# Altium PCB 12-digit-display.PcbDoc
Units mil, origin at the board's own origin, x right, y up, seen from the top; angles counter-clockwise.
Board outline 4900 x 1250 mil, 2 copper layers (Top Layer, Bottom Layer); 13 components, 20 nets, 142 pads, 0 vias.
Unrouted connection lines stored in the file: 1.
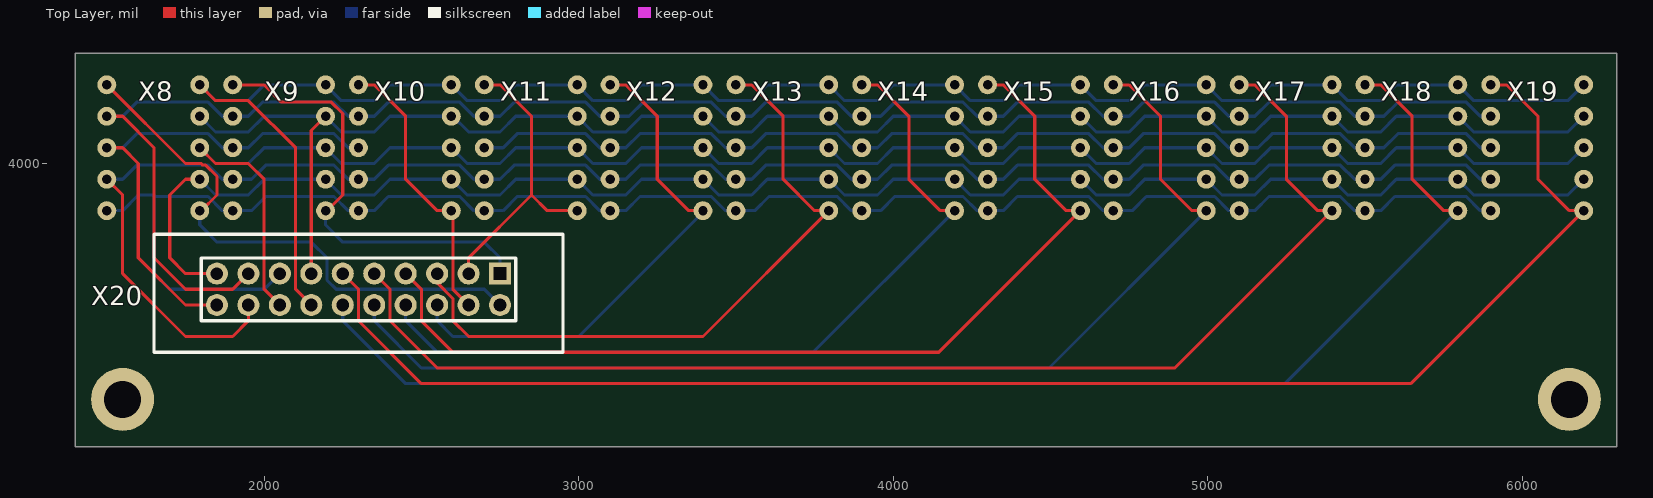
[diagram p0: Top Layer view]
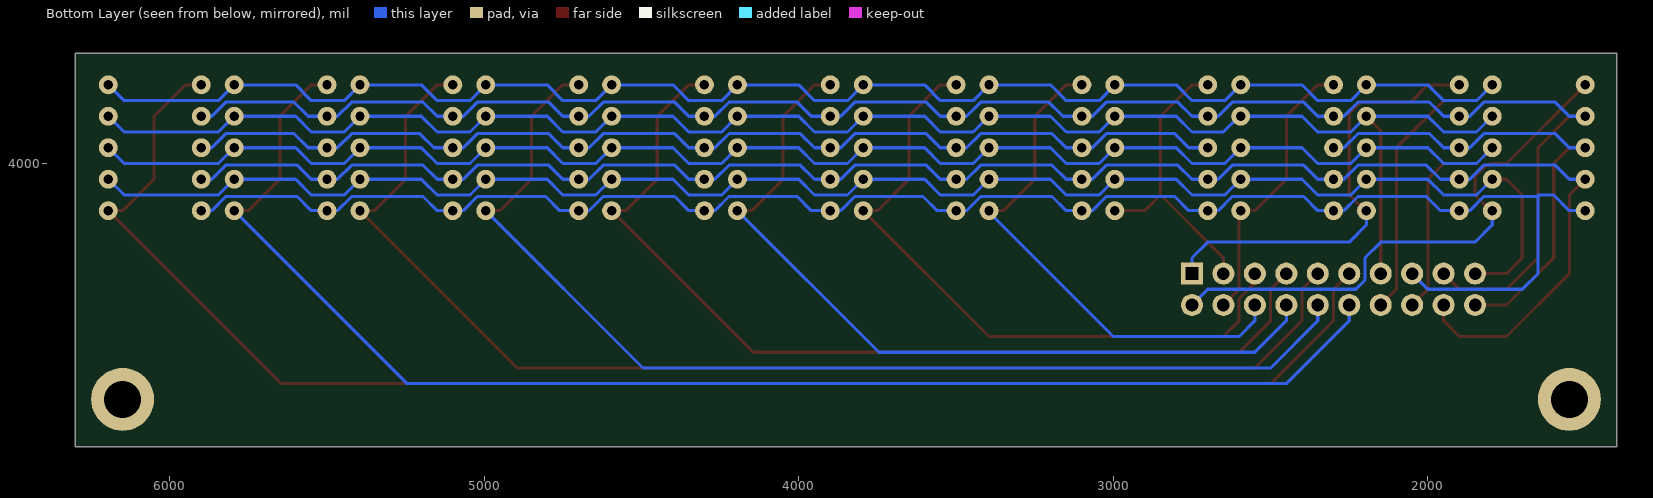
[diagram p1: Bottom Layer view, seen from below]
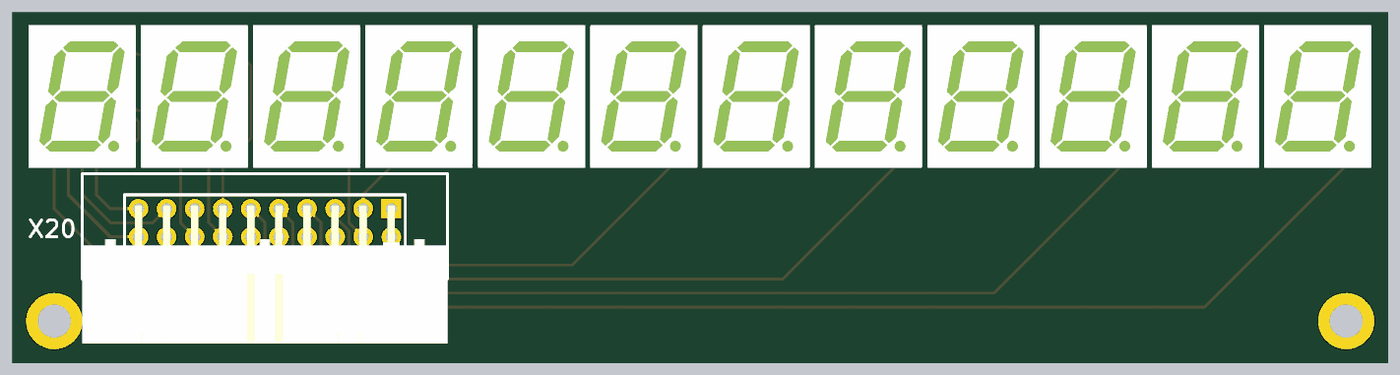
[diagram p2: 3D render of the assembled board from above, using the file's embedded part models]

## Layer stack, top to bottom
Top Solder: solder mask 0.4, Solder Resist, Dk 3.5
Top Layer: signal copper 1.4
Dielectric 1: dielectric 12.6, FR-4, Dk 4.8
Bottom Layer: signal copper 1.4
Bottom Solder: solder mask 0.4, Solder Resist, Dk 3.5

## Board outline
1400,3100 1400,4350 6300,4350 6300,3100

## Design rules (kind name [scope] priority, off if disabled: settings)
Clearance [All] p1: gap=10
PolygonConnect [All] p1: connectstyle=Relief reliefconductorwidth=10 reliefentries=4 polygonreliefangle="90 Angle" airgapwidth=10
RoomDefinition 12-digit-display [InComponentClass('12-digit-display')] p1: confinementstyle=ConfineIn formatcopy=TRUE lockcomponents=FALSE outline 1425,3125 6275,3125 6275,4325 1425,4325
RoutingVias [All] p1: holewidth=28 width=50 viastyle="Through Hole" minholewidth=28 minwidth=50 maxholewidth=28 maxwidth=50
SolderMaskExpansion [All] p1: expansion=4
Width [All] p1: maxlimit=10 minlimit=10 preferedwidth=10
29 further rules are at their usual default settings.

## Components (designator, comment, footprint, x,y, rotation, side; value= is the part's Value field where it differs from the comment)
X8 "FYS-3912" FYS-3916 1500,4250 r0 top
X9 "FYS-3912" FYS-3916 1900,4250 r0 top
X10 "FYS-3912" FYS-3916 2300,4250 r0 top
X11 "FYS-3912" FYS-3916 2700,4250 r0 top
X12 "FYS-3912" FYS-3916 3100,4250 r0 top
X13 "FYS-3912" FYS-3916 3500,4250 r0 top
X14 "FYS-3912" FYS-3916 3900,4250 r0 top
X15 "FYS-3912" FYS-3916 4300,4250 r0 top
X16 "FYS-3912" FYS-3916 4700,4250 r0 top
X17 "FYS-3912" FYS-3916 5100,4250 r0 top
X18 "FYS-3912" FYS-3916 5500,4250 r0 top
X19 "FYS-3912" FYS-3916 5900,4250 r0 top
X20 "DIL-CONN-20" DIL-CONN-IDC-20R 2750,3650 r270 top

## Footprints (in the part's own frame and the unit in brackets; to place one, negate y for a bottom-side part, rotate by r counter-clockwise, add the part's x,y. Pads: shape width x height; smd on the part's side, far side on the other; paste and mask are expansions set on the pad)
DIL-CONN-IDC-20R [mil]
  rect 70x70 hole 40 square: 1(0,0)
  round 70 hole 40: 2(100,0) 3(0,-100) 4(100,-100) 5(0,-200) 6(100,-200) 7(0,-300) 8(100,-300) 9(0,-400) 10(100,-400) 11(0,-500) 12(100,-500) 13(0,-600) 14(100,-600) 15(0,-700) 16(100,-700) 17(0,-800) 18(100,-800) 19(0,-900) 20(100,-900)
  silkscreen extent -125,-1100 250,200, body extent -12,-1100 481,200, height 364
FYS-3916 [mil]
  round 60 hole 30: 1(0,0) 2(0,-100) 3(0,-200) 4(0,-300) 5(0,-400) 6(295.28,-400) 7(295.28,-300) 8(295.28,-200) 9(295.28,-100) 10(295.28,0)
  body extent -42,-454 340,54, height 276

## Free pads (board coordinates)
  round 200 hole 118.11: ""(1550,3250) ""(6150,3250)

## Nets (pads, with @x,y where several pads share a name; then routed paths per layer and width w, separated by ;. In a path a pad name is that pad's centre, name@x,y a point inside that pad or via, vN(x,y) a via of type N, cw(c..) or ccw(c..) an arc to the next point about the centre after c; other vN are vias at no path point)
1: X8.1 X8.6 X20.2 | length 1751.9
  Top Layer w10: X8.1 1750,4000 1800,4000 1805,3995 1813.92,3995 1850,3958.92 1850,3900 1800,3850 X8.6
  Bottom Layer w10: X8.6 1795.28,3804.72 1850,3750 2150,3750 2200,3700 2200,3629.29 2229.29,3600 2700,3600 X20.2
2: X9.1 X9.6 X20.1 | length 1415.5
  Top Layer w10: X9.1 2000,4250 2055,4195 2213.92,4195 2250,4158.92 2250,3900 2200,3850 X9.6
  Bottom Layer w10: X9.6 2195.28,3804.72 2250,3750 2700,3750 2750,3700 X20.1
3: X10.1 X10.6 X20.4 | length 900.8
  Top Layer w10: X10.1 2350,4250 2450,4150 2450,3950 2550,3850 X10.6 2600,3845.28 2600,3600 X20.4
4: X11.1 X11.6 X20.3 | length 990.3
  Top Layer w10: X20.3 2650,3700 2850,3900 ; X11.1 2750,4250 2850,4150 2850,3900 ; 2850,3950 2850,3900 ; X11.6 2900,3850 2850,3900
5: X12.1 X12.6 X20.6 | length 1662.6
  Top Layer w10: X12.1 3150,4250 3250,4150 3250,3950 3350,3850 X12.6
  Bottom Layer w10: X20.6 2550,3500 2600,3450 3000,3450 3395.28,3845.28 X12.6
6: X13.1 X13.6 X20.5 | length 2130.5
  Top Layer w10: X20.5 2550,3620.71 2600,3570.71 2600,3500 2650,3450 3395.28,3450 X13.6 3750,3850 3650,3950 3650,4150 3550,4250 X13.1
7: X14.1 X14.6 X20.8 | length 2601.2
  Top Layer w10: X14.1 3950,4250 4050,4150 4050,3950 4150,3850 X14.6
  Bottom Layer w10: X20.8 2450,3500 2550,3400 3745.28,3400 X14.6
8: X15.1 X15.6 X20.7 | length 3071.9
  Top Layer w10: X20.7 2500,3600 2500,3500 2600,3400 4145.28,3400 X15.6 4550,3850 4450,3950 4450,4150 4350,4250 X15.1
9: X16.1 X16.6 X20.10 | length 3542.6
  Top Layer w10: X16.1 4750,4250 4850,4150 4850,3950 4950,3850 X16.6
  Bottom Layer w10: X20.10 2350,3500 2500,3350 4495.28,3350 X16.6
10: X17.1 X17.6 X20.9 | length 4013.3
  Top Layer w10: X20.9 2400,3600 2400,3500 2550,3350 4895.28,3350 X17.6 5350,3850 5250,3950 5250,4150 5150,4250 X17.1
11: X18.1 X18.6 X20.12 | length 4484.1
  Top Layer w10: X18.1 5550,4250 5650,4150 5650,3950 5750,3850 X18.6
  Bottom Layer w10: X20.12 2250,3500 2450,3300 5245.28,3300 X18.6
12: X19.1 X19.6 X20.11 | length 4954.8
  Top Layer w10: X20.11 2300,3600 2300,3500 2500,3300 5645.28,3300 X19.6 6150,3850 6050,3950 6050,4150 5950,4250 X19.1
A: X8.10 X9.10 X10.10 X11.10 X12.10 X13.10 X14.10 X15.10 X16.10 X17.10 X18.10 X19.10 X20.14 | length 5763.9
  Top Layer w10: X8.10 1845.28,4200 1950,4200 2100,4050 2100,3600 X20.14
  Bottom Layer w10: X8.10 1845.28,4200 1950,4200 2000,4250 X9.10 2245.28,4200 2350,4200 2400,4250 X10.10 2645.28,4200 2750,4200 2800,4250 X11.10 3045.28,4200 3150,4200 3200,4250 X12.10 3445.28,4200 3550,4200 3600,4250 X13.10 3845.28,4200 3950,4200 4000,4250 X14.10 4245.28,4200 4350,4200 4400,4250 X15.10 4645.28,4200 4750,4200 4800,4250 X16.10 5045.28,4200 5150,4200 5200,4250 X17.10 5445.28,4200 5550,4200 5600,4250 X18.10 5845.28,4200 6145.28,4200 X19.10
B: X8.9 X9.9 X10.9 X11.9 X12.9 X13.9 X14.9 X15.9 X16.9 X17.9 X18.9 X19.9 X20.13 | length 5374.4
  Top Layer w10: X20.13 2150,4104.72 X9.9
  Bottom Layer w10: X8.9 1845.28,4100 1950,4100 2000,4150 X9.9 2245.28,4100 2350,4100 2400,4150 X10.9 2600,4150 2650,4100 2750,4100 2800,4150 X11.9 3045.28,4100 3150,4100 3200,4150 X12.9 3445.28,4100 3550,4100 3600,4150 X13.9 3845.28,4100 3950,4100 4000,4150 X14.9 4245.28,4100 4350,4100 4400,4150 X15.9 4645.28,4100 4750,4100 4800,4150 X16.9 5045.28,4100 5150,4100 5200,4150 X17.9 5445.28,4100 5550,4100 5600,4150 X18.9 5845.28,4100 6145.28,4100 X19.9
C: X8.8 X9.8 X10.8 X11.8 X12.8 X13.8 X14.8 X15.8 X16.8 X17.8 X18.8 X19.8 X20.16 | length 5522.5
  Top Layer w10: X8.8 1845.28,4000 1950,4000 2000,3950 2000,3600 X20.16
  Bottom Layer w10: X8.8 1845.28,4000 1950,4000 2000,4050 X9.8 2245.28,4000 2350,4000 2400,4050 X10.8 2645.28,4000 2750,4000 2800,4050 X11.8 3045.28,4000 3150,4000 3200,4050 X12.8 3445.28,4000 3550,4000 3600,4050 X13.8 3845.28,4000 3950,4000 4000,4050 X14.8 4245.28,4000 4350,4000 4400,4050 X15.8 4645.28,4000 4750,4000 4800,4050 X16.8 5045.28,4000 5150,4000 5200,4050 X17.8 5445.28,4000 5550,4000 5600,4050 X18.8 5845.28,4000 6145.28,4000 X19.8
D: X8.5 X9.5 X10.5 X11.5 X12.5 X13.5 X14.5 X15.5 X16.5 X17.5 X18.5 X19.5 X20.15 | length 5505.6
  Bottom Layer w10: X8.5 1550,3850 1600,3900 1650,3900 ; X20.15 2000,3600 1700,3600 1650,3650 1650,3900 ; X19.5 5866.99,3850 5821.99,3895 5595,3895 5550,3850 X18.5 5466.99,3850 5421.99,3895 5195,3895 5150,3850 X17.5 5066.99,3850 5021.99,3895 4805,3895 4760,3850 X16.5 4666.99,3850 4621.99,3895 4395,3895 4350,3850 X15.5 4266.99,3850 4221.99,3895 4005,3895 3960,3850 X14.5 3866.99,3850 3821.99,3895 3605,3895 3560,3850 X13.5 3466.99,3850 3421.99,3895 3195,3895 3150,3850 X12.5 3066.99,3850 3021.99,3895 2805,3895 2760,3850 X11.5 2666.99,3850 2621.99,3895 2395,3895 2350,3850 X10.5 2266.99,3850 2221.99,3895 2005,3895 1960,3850 X9.5 1866.99,3850 1821.99,3895 1655,3895 1650,3900
DP: X8.7 X9.7 X10.7 X11.7 X12.7 X13.7 X14.7 X15.7 X16.7 X17.7 X18.7 X19.7 X20.19 | length 5342.3
  Top Layer w10: X8.7 1750,3950 1700,3900 1700,3700 1750,3650 X20.19
  Bottom Layer w10: X8.7 1845.28,3900 1950,3900 2000,3950 X9.7 2245.28,3900 2350,3900 2400,3950 X10.7 2645.28,3900 2750,3900 2800,3950 X11.7 3045.28,3900 3150,3900 3200,3950 X12.7 3445.28,3900 3550,3900 3600,3950 X13.7 3845.28,3900 3950,3900 4000,3950 X14.7 4245.28,3900 4350,3900 4400,3950 X15.7 4645.28,3900 4750,3900 4800,3950 X16.7 5045.28,3900 5150,3900 5200,3950 X17.7 5445.28,3900 5550,3900 5600,3950 X18.7 5845.28,3900 6145.28,3900 X19.7
E: X8.4 X9.4 X10.4 X11.4 X12.4 X13.4 X14.4 X15.4 X16.4 X17.4 X18.4 X19.4 X20.18 | length 5684.3
  Top Layer w10: X8.4 1550,3900 1550,3650 1750,3450 1900,3450 1950,3500 X20.18
  Bottom Layer w10: X8.4 1550,3950 1595,3995 1821.99,3995 1866.99,3950 X9.4 1960,3950 2005,3995 2221.99,3995 2266.99,3950 X10.4 2350,3950 2395,3995 2621.99,3995 2666.99,3950 X11.4 2750,3950 2795,3995 3021.99,3995 3066.99,3950 X12.4 3150,3950 3195,3995 3421.99,3995 3466.99,3950 X13.4 3550,3950 3595,3995 3821.99,3995 3866.99,3950 X14.4 3950,3950 3995,3995 4221.99,3995 4266.99,3950 X15.4 4350,3950 4395,3995 4621.99,3995 4666.99,3950 X16.4 4750,3950 4795,3995 5021.99,3995 5066.99,3950 X17.4 5150,3950 5195,3995 5421.99,3995 5466.99,3950 X18.4 5550,3950 5595,3995 5821.99,3995 5866.99,3950 X19.4
F: X8.2 X9.2 X10.2 X11.2 X12.2 X13.2 X14.2 X15.2 X16.2 X17.2 X18.2 X19.2 X20.17 | length 5713.6
  Top Layer w10: X8.2 1550,4150 1650,4050 1650,3700 1750,3600 1900,3600 X20.17
  Bottom Layer w10: X8.2 1550,4150 1595,4195 1821.99,4195 1866.99,4150 X9.2 1950,4150 1995,4195 2221.99,4195 2266.99,4150 X10.2 2350,4150 2395,4195 2621.99,4195 2666.99,4150 X11.2 2750,4150 2795,4195 3021.99,4195 3066.99,4150 X12.2 3160,4150 3205,4195 3421.99,4195 3466.99,4150 X13.2 3550,4150 3595,4195 3821.99,4195 3866.99,4150 X14.2 3960,4150 4005,4195 4221.99,4195 4266.99,4150 X15.2 4350,4150 4395,4195 4621.99,4195 4666.99,4150 X16.2 4750,4150 4795,4195 5021.99,4195 5066.99,4150 X17.2 5150,4150 5195,4195 5421.99,4195 5466.99,4150 X18.2 5560,4150 5605,4195 5821.99,4195 5866.99,4150 X19.2
G: X8.3 X9.3 X10.3 X11.3 X12.3 X13.3 X14.3 X15.3 X16.3 X17.3 X18.3 X19.3 X20.20 | length 5105.6
  Top Layer w10: X8.3 1550,4050 1600,4000 1600,3700 1750,3550 X20.20
  Bottom Layer w10: X8.3 1550,4050 1595,4095 1821.99,4095 1866.99,4050 X9.3 1950,4050 1995,4095 2221.99,4095 2266.99,4050 X10.3 ; X11.3 2760,4050 2805,4095 3021.99,4095 3066.99,4050 X12.3 3150,4050 3195,4095 3421.99,4095 3466.99,4050 X13.3 3550,4050 3595,4095 3821.99,4095 3866.99,4050 X14.3 3950,4050 3995,4095 4221.99,4095 4266.99,4050 X15.3 4350,4050 4395,4095 4621.99,4095 4666.99,4050 X16.3 4750,4050 4795,4095 5021.99,4095 5066.99,4050 X17.3 5160,4050 5205,4095 5421.99,4095 5466.99,4050 X18.3 5560,4050 5605,4095 5821.99,4095 5866.99,4050 X19.3

## Silkscreen, mask and mechanical layers (free items; w line width, h text height)
Mechanical 1:
  the board outline again, w10